# Altium PCB PCB1.PcbDoc
Units mm, origin at the board's own origin, x right, y up, seen from the top; angles counter-clockwise.
Board outline 83.31 x 55.5 mm, 2 copper layers (Top Layer, Bottom Layer); 15 components, 15 nets, 63 pads, 6 vias.
Unrouted connection lines stored in the file: 2.
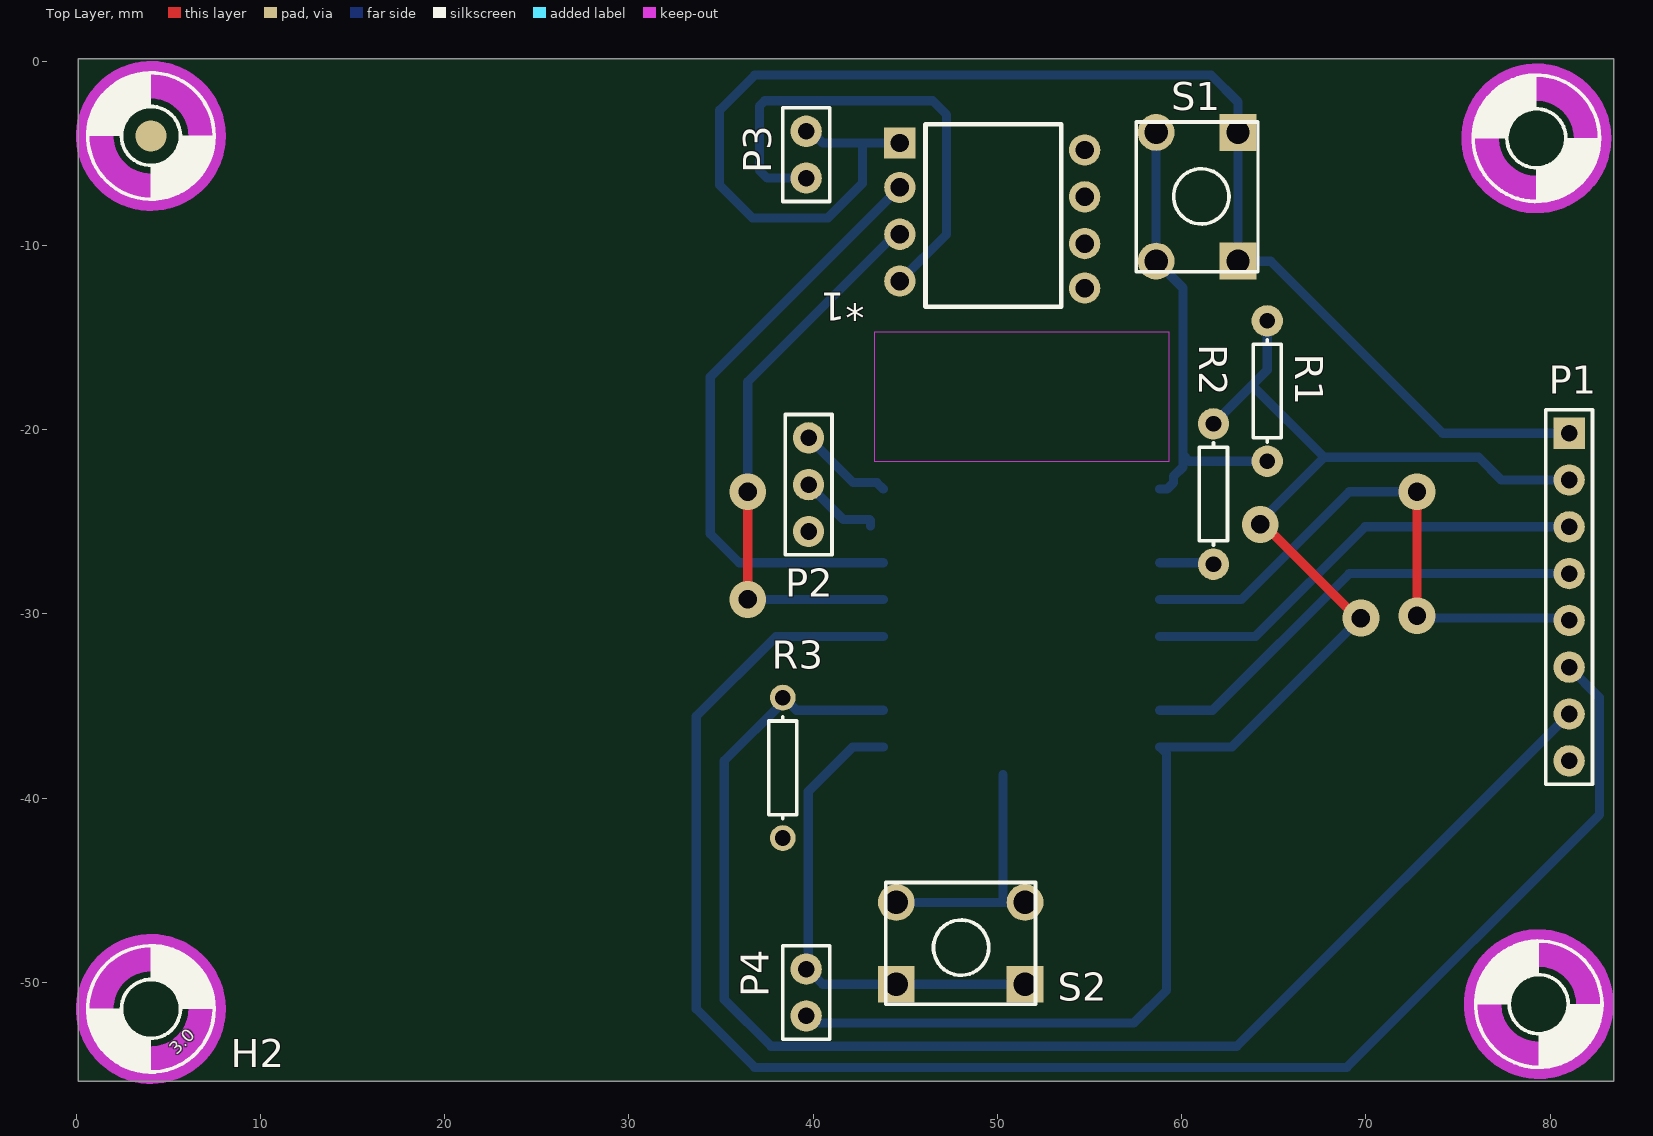
[diagram p0: Top Layer view]
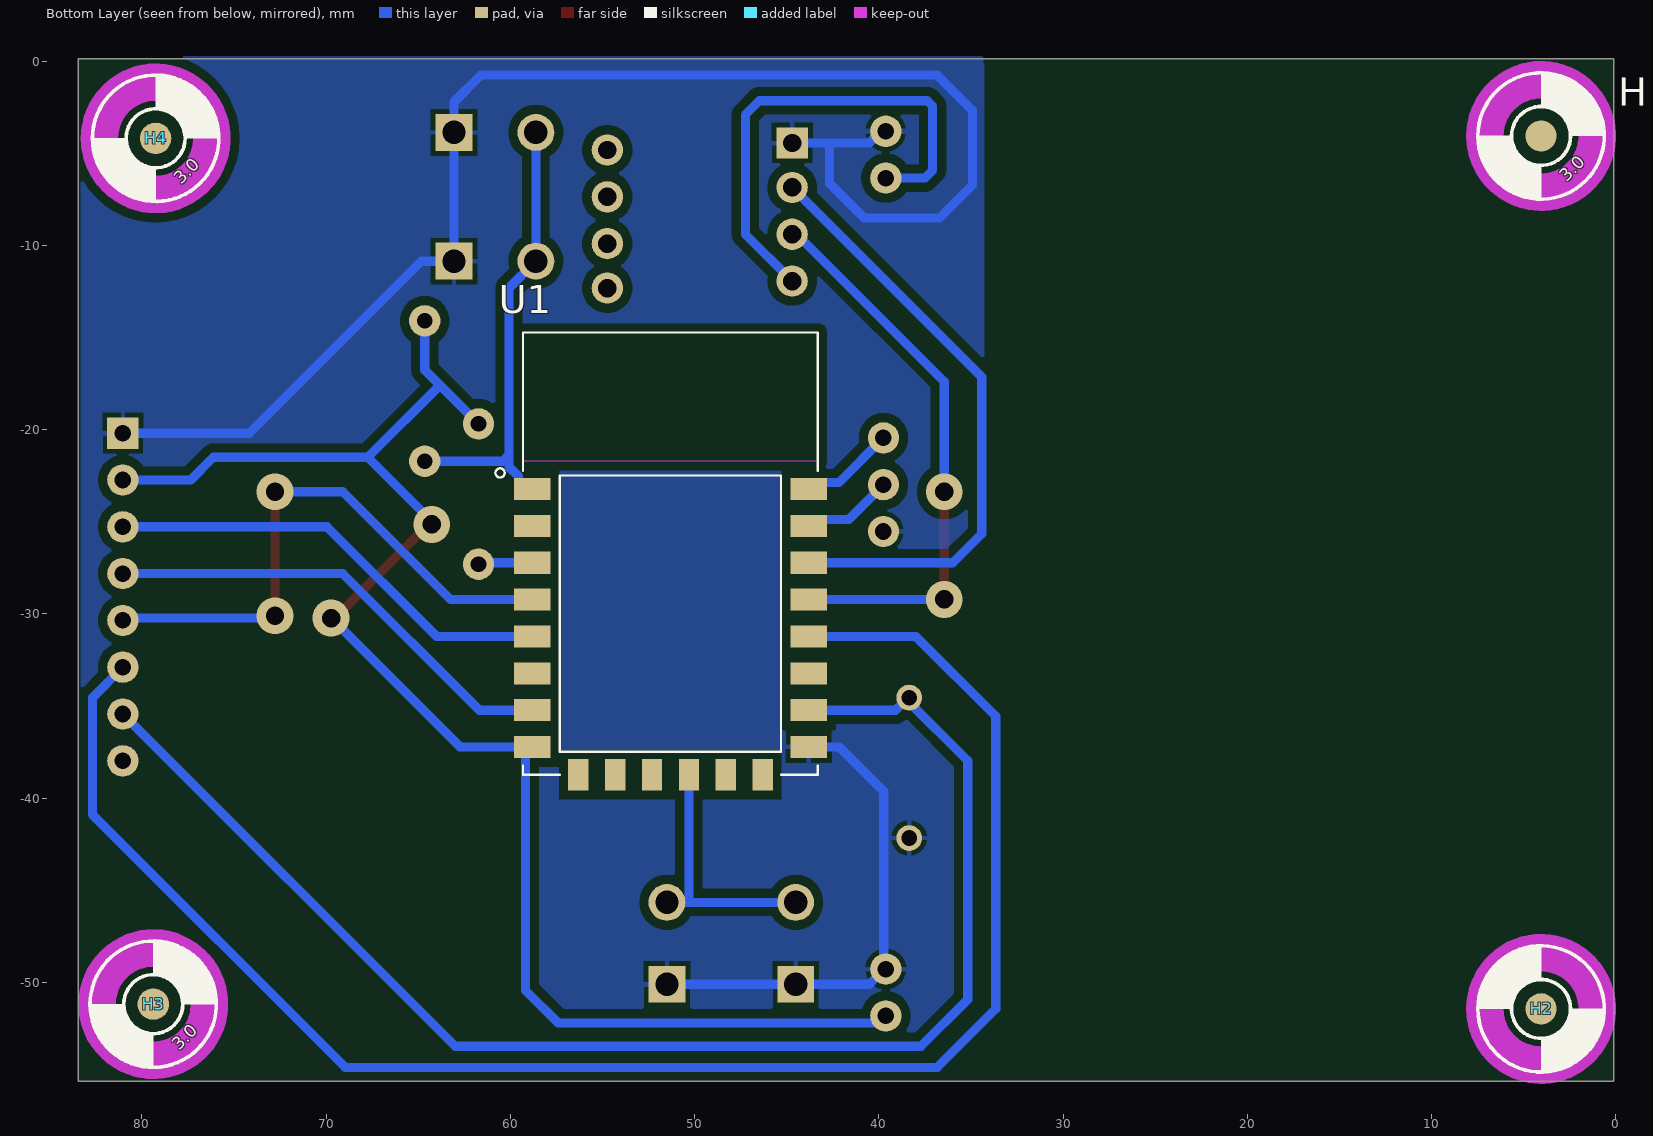
[diagram p1: Bottom Layer view, seen from below]

## Layer stack, top to bottom
Top Solder: solder mask 0.0102, Solder Resist, Dk 3.5
Top Layer: signal copper 0.0356
Dielectric 1: dielectric 0.32, FR-4, Dk 4.8
Bottom Layer: signal copper 0.0356
Bottom Solder: solder mask 0.0102, Solder Resist, Dk 3.5

## Board outline
0.127,-55.372 0.127,0.127 83.439,0.127 83.439,-55.372

## Design rules (kind name [scope] priority, off if disabled: settings)
Clearance [All] p1: gap=0.5 ignorepadtopadclearanceinfootprint=FALSE
HoleSize [All] p1: absolutevalues=TRUE maxlimit=2.54 minlimit=1 maxpercent=80.000 minpercent=20.000
PolygonConnect [All] p1: connectstyle=Relief reliefconductorwidth=0.254 reliefentries=4 polygonreliefangle="90 Angle" airgapwidth=0.254
RoutingVias [All] p1: holewidth=1 width=2 viastyle="Through Hole" minholewidth=1 minwidth=2 maxholewidth=1.5 maxwidth=3
SolderMaskExpansion [All] p1: expansion=0.102 istentingtop=FALSE
Width [All] p1: maxlimit=2 minlimit=0.5 preferedwidth=1.5
29 further rules are at their usual default settings.

## Components (designator, comment, footprint, x,y, rotation, side; value= is the part's Value field where it differs from the comment)
*1 "MAX30102" PCBComponent_1 49.276,-7.239 r0 top
H1 "HOLE" P3.0#1 4.064,-4.064 r180 bottom
H2 "HOLE" P3.0#2 4.064,-51.435 r0 top
H3 "HOLE" P3.0#3 79.375,-51.181 r180 bottom
H4 "HOLE" P3.0#3 79.248,-4.191 r180 bottom
P1 "TFT OLED" HDR1X8 81.026,-20.193 r270 top
P2 "Header 3" HDR1X3 39.751,-20.447 r270 top
P3 "Header 2" HDR1X2 39.624,-6.35 r90 top
P4 "Header 2" HDR1X2 39.624,-51.816 r90 top
R1 "Res1" AXIAL-0.3#1 64.643,-17.907 r270 top value=10K
R2 "Res1" AXIAL-0.3#1 61.722,-23.495 r270 top value=10K
R3 "Res1" AXIAL-0.3#2 38.354,-38.354 r270 top value=10K
S1 "Switch PB" "Switch - Push to On" 60.833,-7.366 r270 top
S2 "BUTTON" "Switch - Push to On" 48.006,-47.879 r180 top
U1 "ESP8266-12E/ESP-12E" XCVR_ESP8266-12E/ESP-12E 51.308,-30.226 r180 bottom

## Footprints (in the part's own frame and the unit in brackets; to place one, negate y for a bottom-side part, rotate by r counter-clockwise, add the part's x,y. Pads: shape width x height; smd on the part's side, far side on the other; paste and mask are expansions set on the pad)
AXIAL-0.3#1 [mm] "Axial Device, Thru-Hole; 2 Leads; 0.3 in Pin Spacing"
  round 1.7 hole 0.85: 1(-3.81,0) 2(3.81,0)
  silkscreen extent -2.77,-0.76 2.77,0.76
AXIAL-0.3#2 [mm] "Axial Device, Thru-Hole; 2 Leads; 0.3 in Pin Spacing"
  round 1.4 hole 0.85: 1(-3.81,0) 2(3.81,0)
  silkscreen extent -2.77,-0.76 2.77,0.76
HDR1X2 [mm] "Connector; Header; 2 Position"
  round 1.7 hole 0.9: 1(0,0) 2(2.54,0)
  silkscreen extent -1.27,-1.27 3.81,1.27
HDR1X3 [mm] "Connector; Header; 3 Position"
  round 1.7 hole 0.9: 1(0,0) 2(2.54,0) 3(5.08,0)
  silkscreen extent -1.27,-1.27 6.35,1.27
HDR1X8 [mm] "Connector; Header; 8 Position"
  rect 1.7x1.7 hole 0.9: 1(0,0)
  round 1.7 hole 0.9: 2(2.54,0) 3(5.08,0) 4(7.62,0) 5(10.16,0) 6(12.7,0) 7(15.24,0) 8(17.78,0)
  silkscreen extent -1.27,-1.27 19.05,1.27
P3.0#1 [mm] "MOUNTING HOLE 3.0 mm with drill center"
  round 1.7 all layers, no hole: MH(0,0)
  Keep-Out Layer circle w2.032: c0,0 r3.048
  silkscreen extent -3.43,-3.43 3.43,3.43
P3.0#2 [mm] "MOUNTING HOLE 3.0 mm with drill center"
  round 1.7 smd far side: MH(0,0)
  Keep-Out Layer circle w2.032: c0,0 r3.048
  silkscreen extent -3.43,-3.43 3.43,3.43
P3.0#3 [mm] "MOUNTING HOLE 3.0 mm with drill center"
  round 1.7 smd: MH(0,0)
  Keep-Out Layer circle w2.032: c0,0 r3.048
  silkscreen extent -3.43,-3.43 3.43,3.43
PCBComponent_1 [mm]
  rect 1.7x1.7 hole 1: 1(-4.572,2.794)
  round 1.7 hole 1: 2(-4.572,0.381) 3(-4.572,-2.159) 4(-4.572,-4.699) 5(5.461,2.413) 6(5.461,-0.127) 7(5.461,-2.667) 8(5.461,-5.08)
  silkscreen extent -3.17,-6.1 4.19,3.81, body extent -5.84,-6.22 6.73,3.94, height 5.37
"Switch - Push to On" [mm]
  rect 2x2 hole 1.27: 1(-3.493,2.222) 1(3.492,2.223)
  round 2 hole 1.27: 2(-3.492,-2.223) 2(3.493,-2.222)
  silkscreen extent -4.06,-3.3 4.06,3.3, body extent -3.93,-3.08 3.99,3.12, height 5.21
XCVR_ESP8266-12E/ESP-12E [mm]
  rect 2x1.2 smd: 1(-7.5,7) 2(-7.5,5) 3(-7.5,3) 4(-7.5,1) 5(-7.5,-1) 6(-7.5,-3) 7(-7.5,-5) 8(-7.5,-7) 15(7.5,-7) 16(7.5,-5) 17(7.5,-3) 18(7.5,-1) 19(7.5,1) 20(7.5,3) 21(7.5,5) 22(7.5,7)
  rect 1.1x1.7 smd: 9(-5,-8.5) 10(-3,-8.5) 11(-1,-8.5) 12(1,-8.5) 13(3,-8.5) 14(5,-8.5)
  Keep-Out Layer region: 8,8.51 -8.009,8.51 -8.009,15.5 8,15.5
  Keep-Out Layer region: 8,8.51 -8.009,8.51 -8.009,15.5 8,15.5
  silkscreen extent -9.5,-8.5 8,15.5, body extent -8.02,-8.5 7.98,15.5, height 3

## Part data
H1 H2 H3 H4: library part MOUNT-HOLE, "MOUNTING HOLE with drill center marker"
P1: library part "Header 8", "Header, 8-Pin", LatestRevisionDate=17-Jul-2002, LatestRevisionNote="Re-released for DXP Platform.", Publisher="Altium Limited"
P2: "Header, 3-Pin", LatestRevisionDate=17-Jul-2002, LatestRevisionNote="Re-released for DXP Platform.", Publisher="Altium Limited"
P3 P4: "Header, 2-Pin", LatestRevisionDate=17-Jul-2002, LatestRevisionNote="Re-released for DXP Platform.", Publisher="Altium Limited"
R1 R2 R3: "Resistor", LatestRevisionDate=17-Jul-2002, LatestRevisionNote="Re-released for DXP Platform.", PackageDescription="Axial Device, Thru-Hole; 2 Leads; 0.3 in Pin Spacing", PackageReference=AXIAL-0.3, Published=8-Jun-2000, Publisher="Altium Limited"
S1: "Push Button Switch"
S2: library part "Switch PB", "Push Button Switch"
U1: "This WiFi module has a 32-bit MCU micro and clock speeds supporting 80 MHz or 160 MHz. Supports the RTOS and integrated Wi-Fi MAC/BB/RF/PA/LNA, and has an on-board antenna.", Package=None, Availability="Not in stock", Check_prices=https://www.snapeda.com/parts/ESP8266-12E/ESP-12E/AI-Thinker/view-part/?ref=eda, MF=AI-Thinker, MP=ESP8266-12E/ESP-12E, Price=None, SnapEDA_Link=https://www.snapeda.com/parts/ESP8266-12E/ESP-12E/AI-Thinker/view-part/?ref=snap

## Via types
v1: diameter 2, hole 1, Top Layer to Bottom Layer, 6 vias

## Nets (pads, with @x,y where several pads share a name; then routed paths per layer and width w, separated by ;. In a path a pad name is that pad's centre, name@x,y a point inside that pad or via, vN(x,y) a via of type N, cw(c..) or ccw(c..) an arc to the next point about the centre after c; other vN are vias at no path point)
+3.3: *1.4 P3.1 | length 26.9
  Bottom Layer w0.5: P3.1 37.508,-6.35 37.084,-5.926 37.084,-2.452 37.377,-2.159 46.482,-2.159 47.244,-2.921 47.244,-9.398 *1.4
CS: P1.7 R3.1 U1.16 | length 77.7
  Bottom Layer w0.5: R3.1 R3.1@38.481,-34.671 ; U1.16 39.097,-35.226 38.542,-34.671 R3.1@38.481,-34.671 ; P1.7 62.992,-53.467 37.719,-53.467 35.179,-50.927 35.179,-37.973 R3.1@38.481,-34.671
DC: P1.6 U1.18 | length 92.5
  Bottom Layer w0.5: U1.18 37.989,-31.226 33.655,-35.56 33.655,-51.435 36.83,-54.61 68.961,-54.61 82.677,-40.894 82.677,-34.544 P1.6
GND: *1.1 P1.1 P2.3 P3.2 P4.2 R3.2 S1.1 S2.1 U1.15 | length 107.6
  Bottom Layer w0.5: P3.2 39.895,-3.81 40.53,-4.445 42.672,-4.445 ; U1.15 42.149,-37.226 39.74,-39.635 39.74,-49.16 P4.2 39.691,-49.276 40.517,-50.102 S2.1@51.498,-50.102 ; *1.1 42.672,-4.445 ; S1.1@63.055,-10.858 64.834,-10.858 74.168,-20.193 P1.1 ; S1.1@63.436,-10.477 63.425,-10.477 63.055,-10.108 63.055,-3.873 63.055,-2.222 61.595,-0.762 36.83,-0.762 34.925,-2.667 34.925,-6.731 36.703,-8.509 40.806,-8.509 42.672,-6.643 42.672,-4.445
MOSI: P1.4 U1.7 | length 25.3
  Bottom Layer w0.5: U1.7 61.675,-35.226 69.088,-27.813 P1.4@81.033,-27.813
NetR1_2: R1.2 S1.2 U1.1 | length 25.4
  Bottom Layer w0.5: S1.2@58.61,-3.873 58.61,-10.858 60.071,-12.319 60.071,-21.373 60.415,-21.717 60.452,-21.717 R1.2 ; U1.1 59.208,-23.226 59.558,-22.876 59.558,-22.536 60.067,-22.027 60.067,-21.373
NetR2_2: R2.2 U1.3 | length 3
  Bottom Layer w0.5: U1.3 R2.2@61.801,-27.226
NetS2_2: S2.2 U1.12 | length 13.9
  Bottom Layer w0.5: S2.2@44.514,-45.657 50.308,-45.657 ; U1.12 50.308,-45.656 ; S2.2@51.498,-45.657 50.308,-45.657
RST: P1.5 U1.4 | length 31.6
  Top Layer w0.5: v1(72.771,-30.099) v1(72.771,-23.368)
  Bottom Layer w0.5: U1.4 63.23,-29.226 69.088,-23.368 v1(72.771,-23.368) ; v1(72.771,-30.099) 72.898,-30.226 80.645,-30.226 P1.5@81.026,-30.607
RX: P2.2 U1.21 | length 4.5
  Bottom Layer w0.5: P2.2 41.64,-24.876 43.058,-24.876 43.108,-24.926 U1.21@43.108,-25.226
SCK: P1.3 U1.5 | length 24.7
  Bottom Layer w0.5: U1.5 63.999,-31.226 69.952,-25.273 P1.3
SCL: *1.2 U1.20 | length 33.1
  Bottom Layer w0.5: U1.20 35.989,-27.226 34.417,-25.654 34.417,-17.145 *1.2
SDA: *1.3 U1.19 | length 30.7
  Top Layer w0.5: v1(36.449,-29.21) v1(36.449,-23.368)
  Bottom Layer w0.5: v1(36.449,-29.21) 36.457,-29.218 43.8,-29.218 U1.19 ; v1(36.449,-23.368) 36.449,-17.399 44.45,-9.398 *1.3
TX: P2.1 U1.22 | length 5.2
  Bottom Layer w0.5: P2.1 42.18,-22.876 43.458,-22.876 U1.22
VCC: P1.2 P4.1 R1.1 R2.1 U1.8 | length 86.4
  Top Layer w0.5: v1(64.262,-25.146) 64.453,-25.146 69.532,-30.226 v1(69.723,-30.226)
  Bottom Layer w0.5: P4.1 39.949,-51.816 40.33,-52.197 57.404,-52.197 59.182,-50.419 59.182,-37.576 58.832,-37.226 U1.8 62.723,-37.226 v1(69.723,-30.226) ; R2.1 63.817,-17.59 ; v1(64.262,-25.146) 64.262,-24.973 67.732,-21.504 ; R1.1 64.643,-16.764 63.817,-17.59 ; P1.2 77.343,-22.733 76.114,-21.504 67.732,-21.504 ; 63.817,-17.59 67.732,-21.504
pads on no net: *1.5 *1.6 *1.7 *1.8 H1.MH H2.MH H3.MH H4.MH P1.8 U1.2 U1.6 U1.9 U1.10 U1.11 U1.13 U1.14 U1.17

## Polygon pours and split planes (outlines as drawn)
GND on Bottom Layer "GND_L02_P001" (solid, remove dead copper, pour order 1): 34.417,0 34.29,-0.127 34.29,-55.372 83.312,-55.372 83.312,0.254 34.417,0.254 34.163,0

## Silkscreen, mask and mechanical layers (free items; w line width, h text height)
Bottom Solder:
  lines w0.254: -0.127,3.302 -0.127,3.302 ; 0.127,-55.372 0.127,-55.372
Mechanical 1:
  the board outline again, w0.254

## Dimensions
73.914,-43.688 to 72.771,-13.589 on Top Overlay

## Text inside footprints (layer, text, board x,y; h text height)
H1: Bottom Overlay "3.0" at 2.667,-6.604 h0.7 r315
H2: Top Overlay "3.0" at 5.461,-53.975 h0.7 r45
H3: Bottom Overlay "3.0" at 77.978,-53.721 h0.7 r315
H4: Bottom Overlay "3.0" at 77.851,-6.731 h0.7 r315